# Altium PCB SOT-23-6_L2.9-W1.6-P0.95-LS2.8-BL-1_2024-04-30.pcbdoc
Units mm, origin at the board's own origin, x right, y up, seen from the top; angles counter-clockwise.
Board outline 33.1 x 29.71 mm, 2 copper layers (Top Layer, Bottom Layer); 1 components, 0 nets, 6 pads, 0 vias.
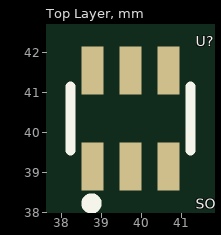
[diagram p0: Top Layer view]
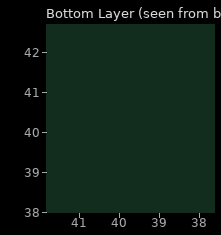
[diagram p1: Bottom Layer view, seen from below]

## Layer stack, top to bottom
Top Layer: signal copper (thickness not stored)
Dielectric: dielectric 0.32, FR-4, Dk 4.8
Bottom Layer: signal copper (thickness not stored)

## Board outline
58.499,25.4 25.4,25.4 25.4,55.106 58.499,55.106

## Components (designator, comment, footprint, x,y, rotation, side; value= is the part's Value field where it differs from the comment)
U? "SOT-23-6_L2.9-W1.6-P0.95-LS2.8-BL-1" SOT-23-6_L2.9-W1.6-P0.95-LS2.8-BL-1 39.727,40.126 r0 top

## Footprints (in the part's own frame and the unit in brackets; to place one, negate y for a bottom-side part, rotate by r counter-clockwise, add the part's x,y. Pads: shape width x height; smd on the part's side, far side on the other; paste and mask are expansions set on the pad)
SOT-23-6_L2.9-W1.6-P0.95-LS2.8-BL-1 [mm]
  rect 0.55x1.2 smd paste+0 mask+0.051: 1(-0.95,-0.974) 2(0,-0.974) 3(0.95,-0.974) 4(0.95,1.426) 5(0,1.426) 6(-0.95,1.426)
  silkscreen extent -1.5,-2.03 1.5,1.03

## Nets (pads, with @x,y where several pads share a name; then routed paths per layer and width w, separated by ;. In a path a pad name is that pad's centre, name@x,y a point inside that pad or via, vN(x,y) a via of type N, cw(c..) or ccw(c..) an arc to the next point about the centre after c; other vN are vias at no path point)
pads on no net: U?.1 U?.2 U?.3 U?.4 U?.5 U?.6